# EAGLE board pCog103_Wifi_Keyboard_TFT (EAGLE 6.6.0)
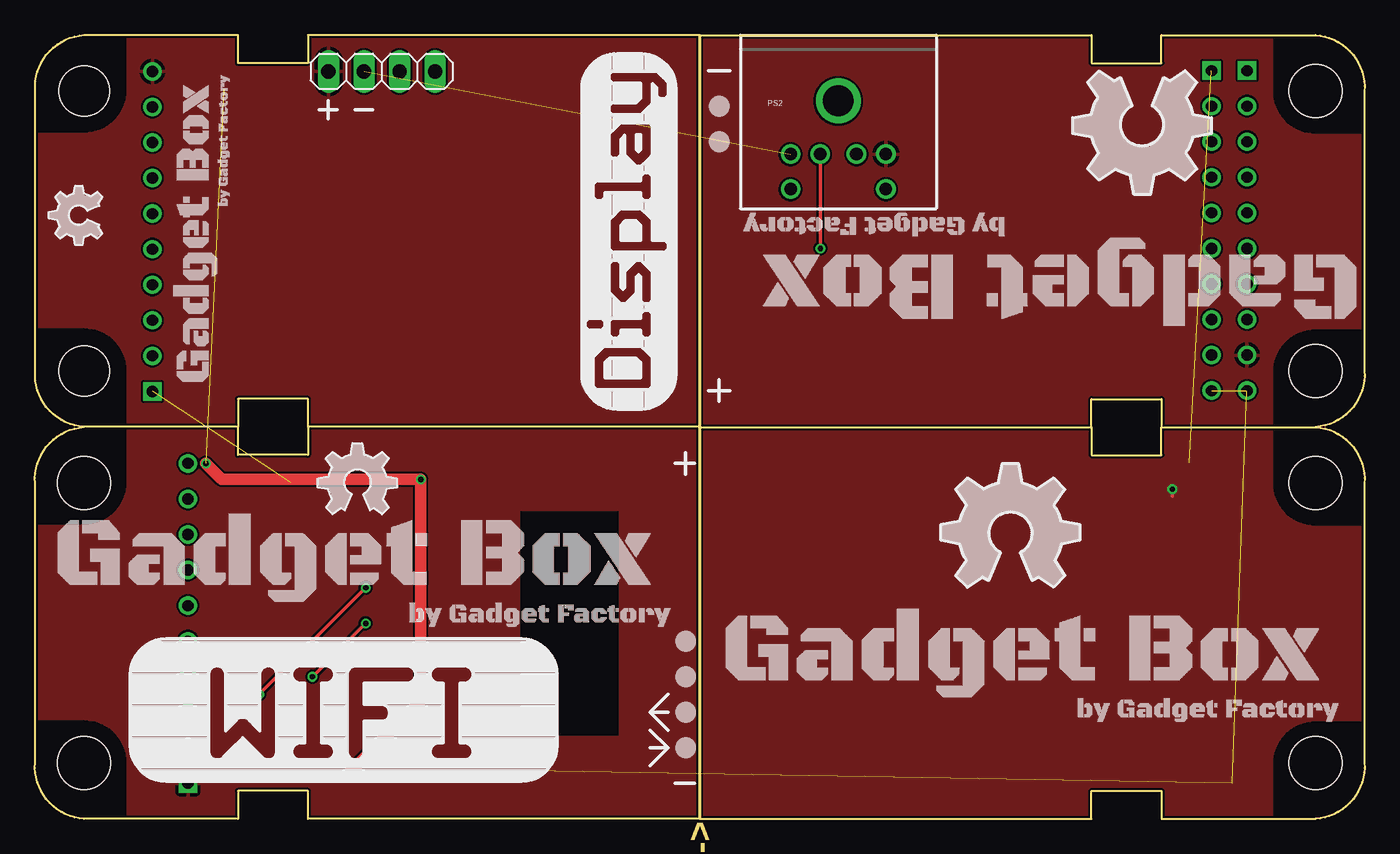
[diagram p0: board, top side]
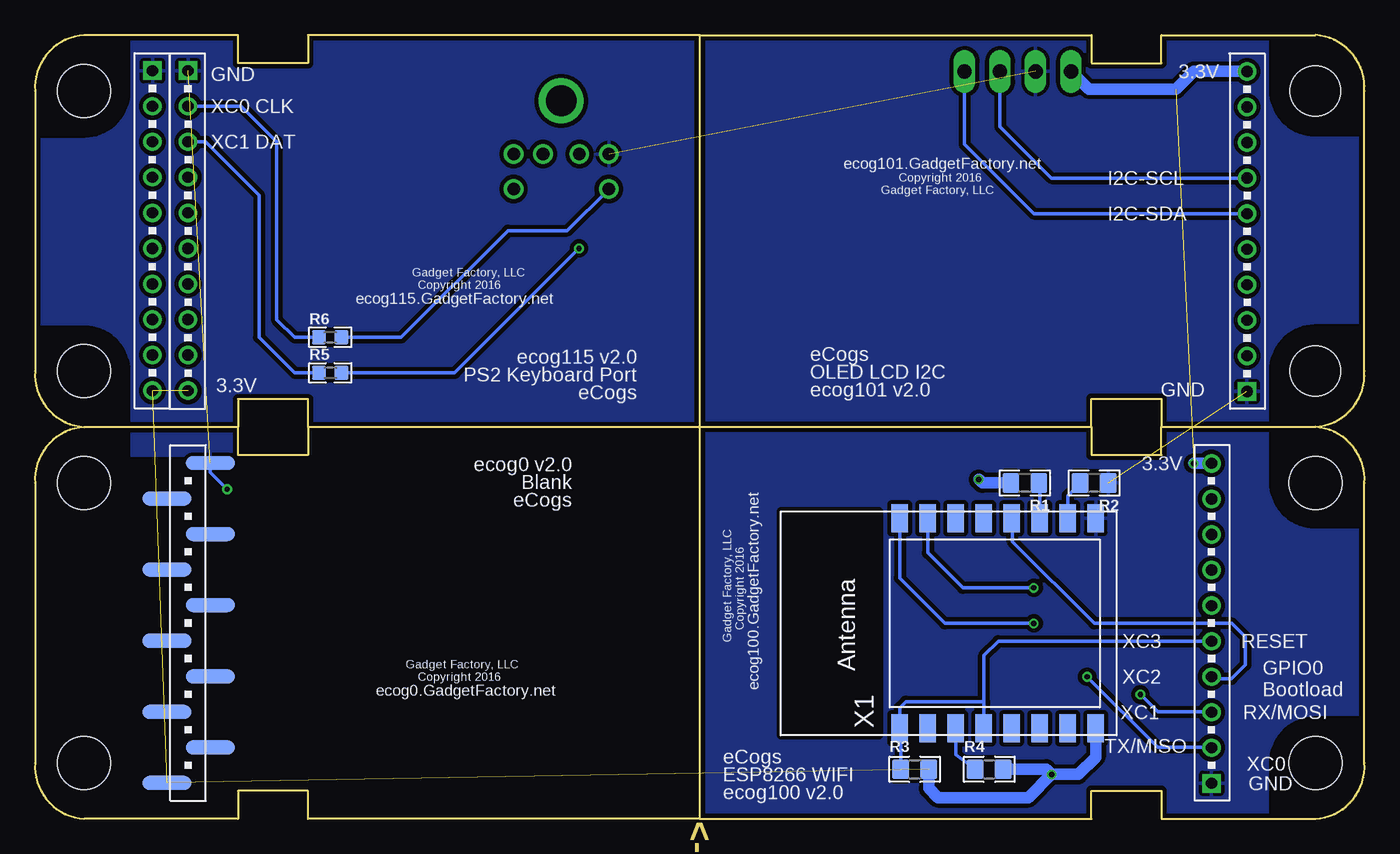
[diagram p1: board, bottom side, seen from below]

Size 95.01 x 56 mm. Coordinates in mm from the lower left corner, seen from the top.
Copper layers (1*16): Top 0.035mm / dielectric 1.5mm / Bottom 0.035mm
Design rules "hackvana": minimum track width 6mil, minimum drill 0.3mm, track to track 6mil, track to pad 6mil, pad to pad 6mil, via to via 6mil, smd to smd 0mil, copper to edge 6mil, drill to drill 6mil, minimum pad ring 10mil, minimum via ring 6mil, stop-mask expansion 2mil, vias tented up to drill 100mil, thermal gap 10mil

## Footprints (pad centres in the part's own frame; a part is rotated, then mirrored left to right if it is on the bottom)
ECOG_GENERAL_TH = drill 0.8: 3V3 11.43,25.4; G0 11.43,5.08; G1 11.43,7.62; G2 11.43,10.16; G3 11.43,12.7; G4 11.43,15.24; G5 11.43,17.78; G6 11.43,20.32; G7 11.43,22.86 | drill 0.8 square: GND 11.43,2.54 | hole 3.8: 4,24; 4,4
ECOG_GENERAL_SMD = smd 3.5 x 1 bottom: 3V3 9.923,25.429; G0 9.923,5.111; G1 13.022,7.649; G2 9.923,10.189; G3 13.022,12.729; G4 9.923,15.269; G5 13.022,17.809; G6 9.923,20.349; G7 13.022,22.889; GND 13.022,2.571 | hole 3.8: 4,24; 4,4
ECOG_BUSES_TH = drill 0.8: 3V3 8.89,25.4; 5V0 8.89,22.86; I2C-SCL 8.89,17.78; I2C-SDA 8.89,15.24; RESET 8.89,20.32; SPI-CS 8.89,12.7; SPI-MISO 8.89,5.08; SPI-MOSI 8.89,7.62; SPI-SCK 8.89,10.16 | drill 0.8 square: GND 8.89,2.54 | hole 3.6: 4.004,24.003; 4.004,4.003
ECOG_DUAL_TH = drill 0.8: 3V3 11.43,25.4; 3V3@B10 8.89,25.4; 5V0 8.89,22.86; G0 11.43,5.08; G1 11.43,7.62; G2 11.43,10.16; G3 11.43,12.7; G4 11.43,15.24; G5 11.43,17.78; G6 11.43,20.32; G7 11.43,22.86; I2C-SCL 8.89,17.78; I2C-SDA 8.89,15.24; RESET 8.89,20.32; SPI-CS 8.89,12.7; SPI-MISO 8.89,5.08; SPI-MOSI 8.89,7.62; SPI-SCK 8.89,10.16 | drill 0.8 square: GND 11.43,2.54; GND@B0 8.89,2.54 | hole 3.8: 4,24; 4,4
1X04 = drill 1.016 long: 1 -3.81,0; 2 -1.27,0; 3 1.27,0; 4 3.81,0
MINI-DIN6 = drill 0.9: 1 -1.3,-8.5; 2 1.3,-8.5; 3 -3.4,-8.5; 4 3.4,-8.5; 5 -3.4,-11; 6 3.4,-11 | drill 2.2: P$1 0,-4.7
0805 = smd 1.2 x 1.4: 1 -1,0; 2 1,0
0603 = smd 1 x 1: 1 -0.8,0; 2 0.8,0
ESP-12 = smd 2 x 1.2: 1 -7.5,4.5; 2 -7.5,2.5; 3 -7.5,0.5; 4 -7.5,-1.5; 5 -7.5,-3.5; 6 -7.5,-5.5; 7 -7.5,-7.5; 8 -7.5,-9.5; 9 7.5,-9.5; 10 7.5,-7.5; 11 7.5,-5.5; 12 7.5,-3.5; 13 7.5,-1.5; 14 7.5,0.5; 15 7.5,2.5; 16 7.5,4.5

## Placement (x,y rotation side)
ECOG  ECOG_GENERAL_ROWTHROUGHOLE  [ECOG_GENERAL_TH]  -0.49,0 0 top
ECOG1  ECOG_GENERAL_ROWSURFACEMOUNT  [ECOG_GENERAL_SMD]  95.51,28 180 top
ECOG2  ECOG_BUSES_ROWTHROUGHHOLE  [ECOG_BUSES_TH]  -0.49,28 0 top
ECOG3  ECOG_DUALTHROUGHHOLE  [ECOG_DUAL_TH]  95.51,56 180 top
JP1  .96 I2C OLED LCD  [1X04]  24.78,53.4 0 top
PS2  MINI-DIN6PTH  [MINI-DIN6]  57.41,56 0 top
R1  10K  [0805]  24.27,24 180 bottom
R2  10K  [0805]  19.32,24 180 bottom
R3  10K  [0805]  32.15,3.56 0 bottom
R4  10K  [0805]  26.81,3.56 0 bottom
R5  390  [0603]  73.92,31.87 0 bottom
R6  390  [0603]  73.92,34.41 0 bottom
U$1  [GADGETBOX_TEXT]  22.89,18.44 0 top
U$2  [LEGEND_DIO]  46.5,12.7 0 top
U$3  [LEGEND_DIO]  46.5,10.16 0 top
U$4  [LEGEND_DIO]  46.5,7.62 0 top
U$5  [LEGEND_DIO]  46.5,5.08 0 top
U$6  [OSHW_FILLX200_NOTEXT]  20.2,21.76 0 top
U$7  [GADGETBOX_TEXT]  70.64,11.64 0 top
U$8  [OSHW_FILLX350_NOTEXT]  64.75,16.54 0 top
U$9  [GADGETBOX_SMALL]  11.53,41.9 90 top
U$10  [OSHW_FILLX150_NOTEXT]  4.81,41 90 top
U$11  [LEGEND_DIO]  48.9,48.38 180 top
U$12  [GADGETBOX_TEXT]  73.15,38.6 180 top
U$13  [OSHW_FILLX350_NOTEXT]  84.08,53.46 180 top
U$14  [LEGEND_DIO]  48.9,50.92 180 top
X1  [ESP-12]  28.72,13.97 90 bottom

## Library data of the parts
ECOG ECOG2 ECOG3 U$2-U$5 U$11 U$14 = eCogs
ECOG1 = eCogs; DIGIKEY: S1013EC-10-ND
JP1 = pinhead; DEALEXTREME: 419232
PS2 = SparkFun-Connectors
R1-R4 = GadgetFactory; DIGIKEY: RMCF0805JT10K0CT-ND
R5 R6 U$1 U$7 U$9 U$12 = GadgetFactory
U$6 U$8 U$10 U$13 = ohw-logo
X1 = adafruit; ADAFRUIT: 2491

## Nets
3V3: ECOG1.3V3 ECOG2.3V3 ECOG3.3V3 ECOG3.3V3@B10 ECOG.3V3 JP1.1 R1.2 R3.2 R4.2 X1.8
5V0: ECOG3.5V0 PS2.4
GND: ECOG1.GND ECOG2.GND ECOG3.GND ECOG3.GND@B0 ECOG.GND JP1.2 PS2.3 R2.1 X1.9
GPIO0/BOOTLOAD: ECOG.G2 X1.12
N$1: ECOG2.I2C-SCL JP1.3
N$2: ECOG2.I2C-SDA JP1.4
N$3: R1.1 X1.11
N$4: R2.2 X1.10
N$5: R4.1 X1.3
N$14: PS2.1 R5.2
N$15: PS2.5 R6.2
PS2CLK2: ECOG3.G0 R6.1
PS2DAT2: ECOG3.G1 R5.1
RESET: ECOG.G3 R3.1 X1.1 X1.4
RX/MOSI: ECOG.G1 X1.15
TX/MISO: ECOG.G0 X1.16

## Tracks (layer width: path | path; a pad name or v marks a point on that pad's centre or on a via)
3V3  (via drill 0.38)  (4 unrouted)
  Top 0.813: v22.37,3.18 27.57,8.38 v27.57,24.26 13.35,24.26 v12.21,25.4
  Bottom 0.813: 19.13,6.38 X1.8 19.22,4.42 20.46,3.18 v22.37,3.18 | R4.2 22.75,3.56 v22.37,3.18 | R3.2 31.15,2.18 30.5,1.53 24.02,1.53 v22.37,3.18 | R1.2 27.32,24 v27.57,24.26 | v12.21,25.4 ECOG.3V3 | JP1.1 19.7,52.13 13.48,52.13 12.21,53.4 ECOG2.3V3
  pour Top: -1.76,57.27 48.78,57.27 48.78,26.73 -1.76,26.73
5V0
  pour Top: 96.51,27 46.51,27 46.51,57 96.51,57
GND  (via drill 0.38)  (3 unrouted)
  Top 0.254: v81.28,23.55 81.28,23.05
  Bottom 0.254: ECOG1.GND 82.48,24.76 v81.28,23.55
  pour Bottom (isolate 0.305): -0.49,28 47.51,28 47.51,0 -0.49,0
  pour Top: -0.49,27.94 47.77,27.94 47.77,0 -0.49,0
  pour Top: 96.51,-1 46.51,-1 46.51,29 96.51,29
  pour Bottom (isolate 0.305): -3.03,58.54 50.05,58.54 50.05,25.46 -3.03,25.46
  pour Bottom (isolate 0.305): 97.51,26 45.51,26 45.51,58 97.51,58
GPIO0/BOOTLOAD
  Bottom 0.254: X1.12 25.16,21.42 25.16,19.81 19.32,13.97 9.48,13.97 8.51,13 8.51,11 9.51,10 10.78,10 ECOG.G2
N$1
  Bottom 0.254: ECOG2.I2C-SCL 22.37,45.78 26.05,49.46 JP1.3
N$2
  Bottom 0.254: ECOG2.I2C-SDA 23.64,43.24 28.59,48.19 JP1.4
N$3
  Bottom 0.254: X1.11 23.22,23.95 R1.1
N$4
  Bottom 0.254: X1.10 21.22,23.11 R2.2
N$5
  Bottom 0.254: X1.3 29.22,4.58 R4.1
N$14  (via drill 0.38)
  Top 0.254: v56.14,40.76 56.14,47.47 PS2.1
  Bottom 0.254: R5.2 65.03,31.87 v56.14,40.76
N$15
  Bottom 0.254: R6.2 68.84,34.41 61.22,42.03 56.98,42.03 PS2.5
PS2CLK2
  Bottom 0.254: ECOG3.G0 80.27,50.92 77.73,48.38 77.73,35.68 76.46,34.41 R6.1
PS2DAT2
  Bottom 0.254: ECOG3.G1 82.81,48.38 79,44.57 79,34.41 76.46,31.87 R5.1
RESET
  Bottom 0.254: 27.19,8.38 27.19,6.5 X1.4 | R3.1 33.15,6.4 X1.1 33.22,7.95 32.78,8.38 27.19,8.38 | 27.19,8.38 27.19,11.69 26.18,12.7 ECOG.G3
RX/MOSI  (via drill 0.38)
  Top 0.254: v16.02,8.89 v23.64,16.51
  Bottom 0.254: 31.26,21.51 X1.15 31.22,19.01 28.72,16.51 v23.64,16.51 | v16.02,8.89 14.78,7.65 10.97,7.65 ECOG.G1
TX/MISO  (via drill 0.38)
  Top 0.254: v19.83,10.16 v23.64,13.97
  Bottom 0.254: 33.04,21.65 X1.16 33.22,17.2 29.99,13.97 v23.64,13.97 | v19.83,10.16 14.78,5.11 10.97,5.11 ECOG.G0

## Text on the board
Dimension: <----vScore | <----vScore | vScore----> | vScore---->
bPlace: 3.3V | GND | XC0 CLK | XC1 DAT | Copyright 2016 | ecog101.GadgetFactory.net | I2C-SCL | Gadget Factory, LLC | I2C-SDA | Gadget Factory, LLC | ecog115.GadgetFactory.net | Copyright 2016 | ecog115 v2.0 | eCogs | PS2 Keyboard Port | OLED LCD I2C | eCogs | GND | ecog101 v2.0 | 3.3V | ecog0 v2.0 | 3.3V | Blank | ecog100.GadgetFactory.net | eCogs | Gadget Factory, LLC | Copyright 2016 | RESET | XC3 | Gadget Factory, LLC | XC2 | ecog0.GadgetFactory.net | Copyright 2016 | GPIO0 / Bootload | RX/MOSI | XC1 | TX/MISO | eCogs | XC0 | ESP8266 WIFI | GND | ecog100 v2.0